# Altium PCB Pedal_Filters_45.PcbDoc (part 2 of 4)
Units mil, origin at the board's own origin, x right, y up, seen from the top; angles counter-clockwise.
Board outline 4875 x 3407.56 mil, 4 copper layers (Top Layer, Layer 1, Layer 2, Bottom Layer); 245 components, 181 nets, 874 pads, 470 vias.
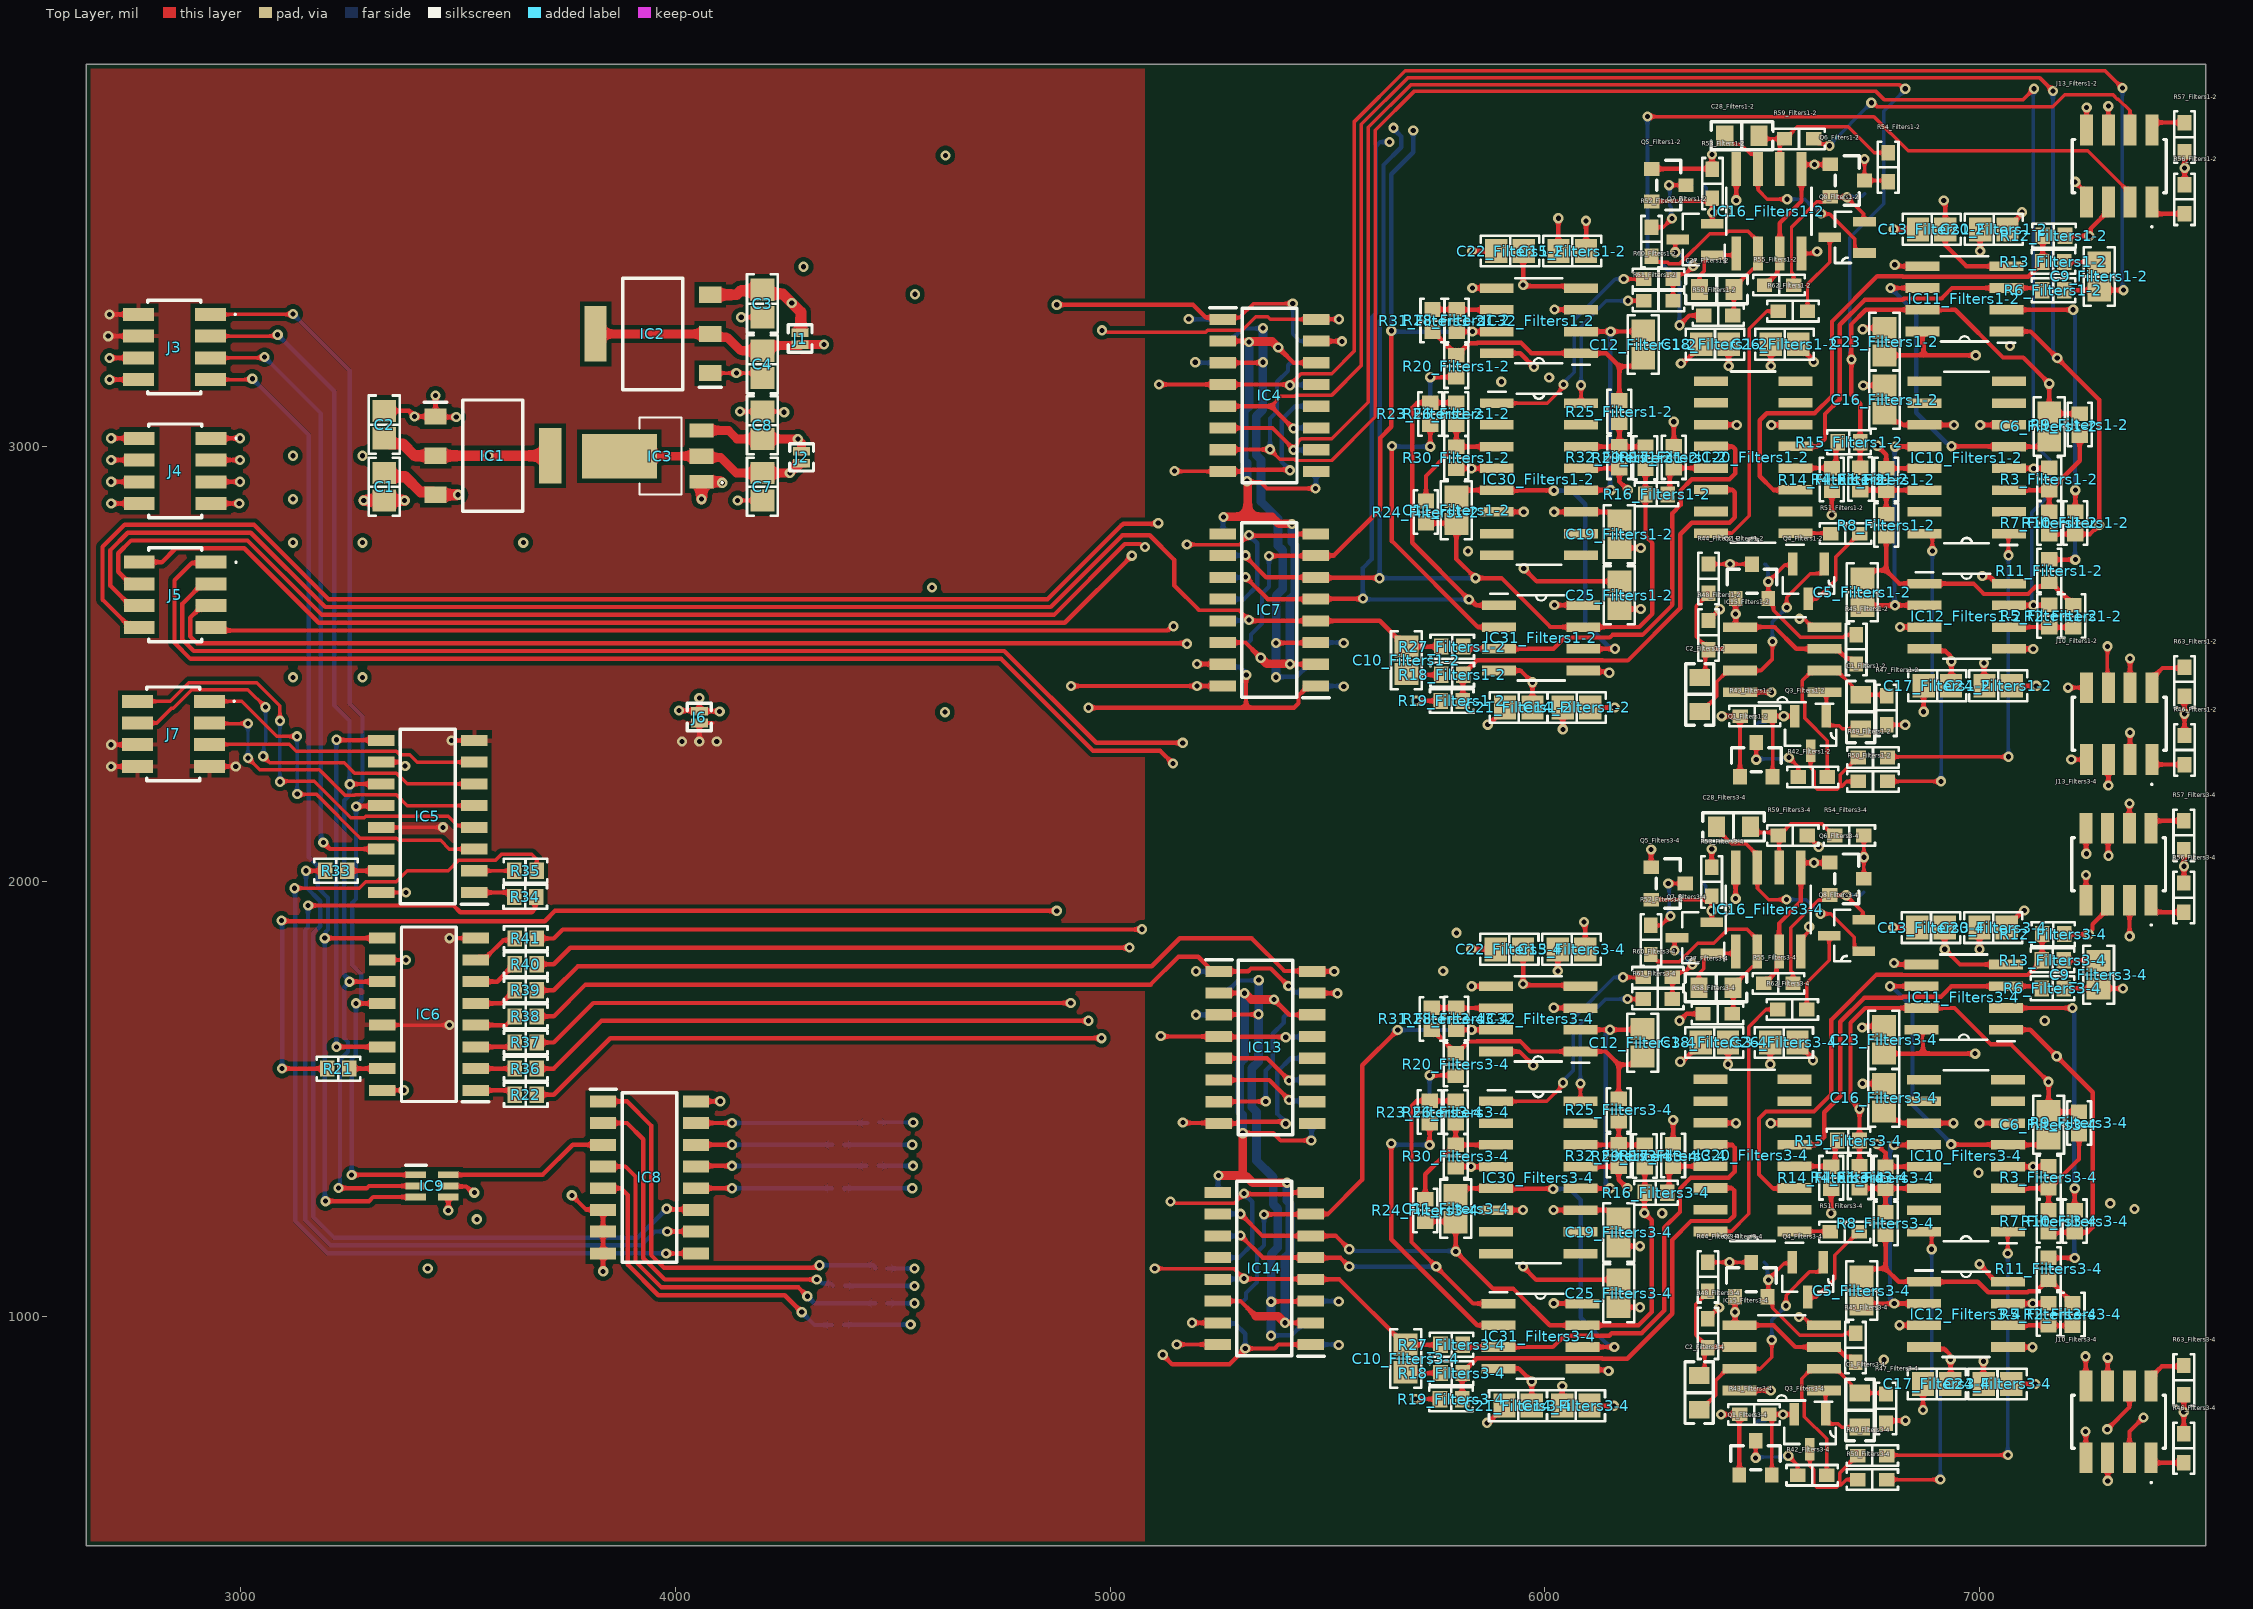
[diagram p0: Top Layer view]

## Part data (continued)
R49_Filters1-2 R49_Filters3-4 R50_Filters1-2 R50_Filters3-4 R51_Filters1-2 R51_Filters3-4 R60_Filters1-2 R60_Filters3-4 R61_Filters1-2 R61_Filters3-4 R62_Filters1-2 R62_Filters3-4: library part AC0603FR-076K8L, "RES SMD 6.8K OHM 1% 1/10W 0603", Device Package="0603 (1608 Metric)", manufacturer=Yageo, Operating Temperature="-55°C ~ 155°C", Power (Watts)="0.1W, 1/10W", Ratings=AEC-Q200, Supplier Device Package=0603, Supplier Part Number 1=YAG3627CT-ND, Temperature Coefficient=±100ppm/°C, Tolerance=±1%, componentlink1description=Datasheet, componentlink1url=https://www.yageo.com/upload/media/product/productsearch/datasheet/rchip/PYu-AC_51_RoHS_L_7.pdf, componentlink2description="DigiKey Link", componentlink2url=https://www.digikey.com/en/products/detail/yageo/AC0603FR-076K8L/5896266, Composition="Thick Film", Features="Automotive AEC-Q200, Moisture Resistant", Height - Seated (Max)="0.022\" (0.55mm)", lastupdated="7/25/2024 9:19:23 AM", Lifecycle Status=Active, Minimum Order=1, Number of Terminations=2, Package / Case="0603 (1608 Metric)", packaging=CutTape, Part Number=AC0603FR-076K8L, Part Status=Active, partid=17383, price=0.01, Resistance="6.8 kOhms", series=AC, Size / Dimension="0.063\" L x 0.031\" W (1.60mm x 0.80mm)", Supplier 1=DigiKey
U1 U2 U3 U4: "Undefined or Miscellaneous", Manufacturer_Name=onsemi, Mouser Part Number=512-CD4052BCM, Datasheet Link=https://datasheet.datasheetarchive.com/originals/distributors/Datasheets_SAMA/f70c20124315e8f3af2d52f76e34e12a.pdf, Height=1.753mm, Manufacturer_Part_Number=CD4052BCM, Mouser Price/Stock=https://www.mouser.co.uk/ProductDetail/onsemi-Fairchild/CD4052BCM?qs=ZhimqmYZ5InGEAD%2FeTU3GA%3D%3D

## Via types
v1: diameter 23.62, hole 11.81, Top Layer to Bottom Layer, 470 vias

## Nets (pads, with @x,y where several pads share a name; then routed paths per layer and width w, separated by ;. In a path a pad name is that pad's centre, name@x,y a point inside that pad or via, vN(x,y) a via of type N, cw(c..) or ccw(c..) an arc to the next point about the centre after c; other vN are vias at no path point)
+5: IC5.10 IC5.16 IC6.10 IC6.16 J3.6 J3.8 | length 2944
  Top Layer w8: IC5.16@3322.72,1975 v1(3380,1975) ; IC6.16@3325.43,1520 v1(3375,1520) ; IC6.10@3325.43,1820 v1(3380,1820)
  Top Layer w10: v1(2698.19,3155) J3.8@2764.65,3155 ; v1(2698.19,3205) J3.6@2764.65,3205 ; IC5.10@3322.72,2275 3365.81,2275 3374.49,2266.32 v1(3378.17,2266.32)
  Layer 2 w20: v1(3375,1520) 3375,1814.02 3380,1819.02 v1(3380,1820) v1(3380,1975)
  Layer 2 w25: v1(2698.19,3205) v1(2698.19,3155) 2698.19,3128.19 2667.5,3097.5 2667.5,2150 2685.5,2132 3110.3,2132 3236.81,2258.5 3247.88,2258.5 3255.7,2266.32 v1(3378.17,2266.32) 3378.17,1976.83 v1(3380,1975)
+5v_DAC: C2.2 IC1.2 IC1.4 IC9.4 | length 2203.7
  Top Layer w10: v1(3477.4,1243.76) IC9.4@3477.4,1274.41
  Top Layer w25: C2.2@3330,3020 3343.09,3006.91 3373.09,3006.91 3400,2980 IC1.2@3448.11,2980 v1(3570,2980) IC1.4@3711.89,2980
  Layer 2 w25: v1(3477.4,1243.76) 3477.4,1327.4 3570,1420 v1(3570,2980)
+12: C1.2 C3.1 C13_Filters1-2.1 C13_Filters3-4.1 C14_Filters1-2.1 C14_Filters3-4.1 C15_Filters1-2.1 C15_Filters3-4.1 C16_Filters1-2.1 C16_Filters3-4.1 C17_Filters1-2.1 C17_Filters3-4.1 C18_Filters1-2.1 C18_Filters3-4.1 C19_Filters1-2.1 C19_Filters3-4.1 IC1.3 IC2.3 IC8.16 IC10_Filters1-2.11 IC10_Filters3-4.11 IC11_Filters1-2.4 IC11_Filters3-4.4 IC12_Filters1-2.4 IC12_Filters3-4.4 IC15_Filters1-2.8 IC15_Filters3-4.8 IC16_Filters1-2.8 IC16_Filters3-4.8 IC20_Filters1-2.11 IC20_Filters3-4.11 IC30_Filters1-2.11 IC30_Filters3-4.11 IC31_Filters1-2.8 IC31_Filters3-4.8 IC32_Filters1-2.8 IC32_Filters3-4.8 J1.2 J4.7 J4.8 R46_Filters1-2.1 R46_Filters3-4.1 R56_Filters1-2.1 R56_Filters3-4.1 R57_Filters1-2.1 R57_Filters3-4.1 R63_Filters1-2.1 R63_Filters3-4.1 | length 21476.5
  Top Layer w10: v1(2701.81,2870) J4.8@2766.46,2870 ; J4.7@2931.81,2870 v1(2996.46,2870) ; IC8.16@4047.13,1494.71 v1(4103.12,1494.71) ; IC32_Filters3-4.8@5887.86,1609.27 5888.11,1609.01 5941.54,1609.01 v1(5973.54,1577.01) ; IC32_Filters1-2.8@5903.5,3215.61 5943.73,3215.61 v1(5975.04,3184.31) ; v1(6020,1244.41) IC30_Filters3-4.11@6082,1244.41 6150,1244.41 C19_Filters3-4.1@6170,1224.41 ; v1(6020.46,1029.97) 6020.74,1029.69 6086.72,1029.69 IC31_Filters3-4.8@6087,1029.41 ; v1(6021.5,2850.76) 6151.5,2850.76 C19_Filters1-2.1@6171.5,2830.76 ; v1(6021.95,2636.31) 6022.23,2636.04 6088.22,2636.04 IC31_Filters1-2.8@6088.5,2635.76 ; v1(6030,1794.41) C15_Filters3-4.1@6030,1844.41 ; v1(6031.08,3526.22) 6031.08,3451.17 C15_Filters1-2.1@6031.5,3450.76 ; C14_Filters3-4.1@6040,794.41 v1(6040,840) ; v1(6041.5,2350.35) C14_Filters1-2.1@6041.5,2400.76 ; IC20_Filters3-4.11@6380.83,1445.23 6381.24,1444.82 6439.59,1444.82 v1(6440,1444.41) ; IC20_Filters1-2.11@6382.32,3051.58 6382.73,3051.17 6441.08,3051.17 v1(6441.5,3050.76) ; v1(6421.5,1580) C18_Filters3-4.1@6421.5,1630 ; v1(6422.99,3186.35) C18_Filters1-2.1@6422.99,3236.35 ; v1(6439,1961) IC16_Filters3-4.8@6439,2033 ; v1(6440.5,3567.35) IC16_Filters1-2.8@6440.5,3639.35 ; IC15_Filters3-4.8@6448,829.41 v1(6520,829.41) ; IC15_Filters1-2.8@6449.5,2435.76 v1(6521.5,2435.76) ; C16_Filters3-4.1@6780,1471.42 6800.59,1450.83 6815.58,1450.83 6822,1444.41 v1(6940,1444.41) ; C16_Filters1-2.1@6781.5,3077.77 6802.09,3057.17 6817.08,3057.17 6823.5,3050.76 IC10_Filters1-2.11@6873.5,3050.76 v1(6941.5,3050.76) ; IC12_Filters3-4.4@6872,929.41 6876.88,924.53 6919.88,924.53 6931.1,913.31 ; IC12_Filters1-2.4@6873.5,2535.76 6878.37,2530.88 6921.37,2530.88 6932.6,2519.65 ; C13_Filters3-4.1@6920,1894.41 v1(6920,1844.41) 6955,1809.41 IC11_Filters3-4.4@7061,1809.41 ; C13_Filters1-2.1@6921.5,3500.76 v1@6921.5,3559.65 ; C13_Filters1-2.1@6921.53,3500.73 6921.53,3464.06 6969.82,3415.76 IC11_Filters1-2.4@7062.5,3415.76 ; C17_Filters3-4.1@6932.99,844.41 6933.71,845.13 v1(6933.71,900.45) ; C17_Filters1-2.1@6934.49,2450.76 6935.21,2451.48 v1(6935.21,2506.8) ; R46_Filters3-4.1@7470,730 R63_Filters3-4.1@7470,820 ; R56_Filters3-4.1@7470,1996.93 7470.47,1997.4 7470.47,2072.6 R57_Filters3-4.1@7470,2073.07 ; R46_Filters1-2.1@7471.5,2336.35 R63_Filters1-2.1@7471.5,2426.35 ; R56_Filters1-2.1@7471.5,3603.28 7471.97,3603.75 7471.97,3678.95 R57_Filters1-2.1@7471.5,3679.42
  Top Layer w25: C1.2@3330,2940 3338.09,2931.91 3378.09,2931.91 3413.96,2896.04 3441.91,2896.04 IC1.3@3448.11,2889.84 3448.27,2890 v1(3500,2890) ; IC2.3@4080,3350.32 4140.31,3350.32 4149.59,3359.59 4198.09,3359.59 C3.1@4200,3361.5 4209.42,3352.08 4246.76,3352.08 v1(4267.58,3331.26) 4288.4,3310.44 J1.2@4288.4,3267.76
  Layer 1 w8: 6060,3540 6078.19,3540 6084.26,3546.07 6105.65,3546.07 6112.55,3539.17 6119.17,3539.17
  Layer 1 w25: v1(2701.81,2870) v1(2996.46,2870) 3060,2870 3100,2830 3440,2830 v1(3500,2890) 3694.47,2890 4137.28,3332.82 4165.71,3332.82 4168.52,3330 4290,3330 4486.22,3526.22 v1(6031.08,3526.22) 6087.3,3470 6188.35,3470 6286.39,3568.04 6299.71,3568.04 6305.27,3573.6 6399.71,3573.6 6405.96,3567.35 v1(6440.5,3567.35) 6472.16,3535.68 6585.66,3535.68 6621.28,3571.31 6649.71,3571.31 6680.49,3540.53 6770.53,3540.53 6797.2,3567.2 v1(6917.64,3567.2)
  Layer 2 w25: v1(6031.08,3526.22) 5984.48,3479.61 5984.48,3336.21 5975.04,3326.77 5975.04,2884.96 6009.24,2850.76 v1(6021.5,2850.76) 6021.5,2636.77 v1(6021.95,2636.31) 6021.95,2369.89 v1(6041.5,2350.35) 6041.5,1805.91 v1(6030,1794.41) 6030,1790 5973.54,1733.54 5973.54,1556.46 5984.21,1545.79 5984.21,1279.68 6005.02,1258.87 6005.54,1258.87 v1(6020,1244.41) 6020,1030.42 v1(6020.46,1029.97) 6020.46,859.54 v1(6040,840) ; v1(6440.5,3567.35) 6422.99,3549.84 v1(6422.99,3186.35) 6441.5,3167.84 v1(6441.5,3050.76) 6441.5,2968.5 6470,2940 6470,2685.76 6480,2675.76 6480,2540 6521.5,2498.5 v1(6521.5,2435.76) ; v1@6519.16,2435.76 6439,2355.6 v1(6439,1961) 6421.5,1943.5 v1(6421.5,1580) 6440,1561.5 v1(6440,1444.41) 6480,1404.41 6480,920 6520,880 v1(6520,829.41) ; v1(6917.64,3567.2) 6941.5,3543.34 6941.5,3500 ; v1(6933.71,900.45) 6933.71,1156.29 6924.31,1165.69 6924.31,1168.62 6900,1192.93 6900,1409.39 6920.56,1429.95 6925.54,1429.95 v1(6940,1444.41) 6940,1824.41 v1(6920,1844.41) 6950,1874.41 6950,2492.01 v1(6935.21,2506.8) 6970,2541.59 6970,3022.25 v1(6941.5,3050.76) 6941.5,3500 ; 7470.47,3440 7150,3440 7090,3500 6941.5,3500
  Layer 2 w50: v1(3650,2780) 3650,1860 4015.29,1494.71 v1(4103.12,1494.71) ; v1(7470,780) 7470.47,780.47 v1(7470.47,2035.38) 7470.47,3440 7470.47,3640.23 v1(7471.97,3641.73)
  other v1: 7471.5,2386.35